# Altium PCB SPINNER_TWIN_STARS.PcbDoc (part 3 of 3)
Units mm, origin at the board's own origin, x right, y up, seen from the top; angles counter-clockwise.
Board outline 105 x 72 mm, 4 copper layers (Top_Elec, Mid Top Layer, Mid Bottom Layer, Bottom_GND), stack 0.742 mm thick; 199 components, 124 nets, 594 pads, 799 vias.
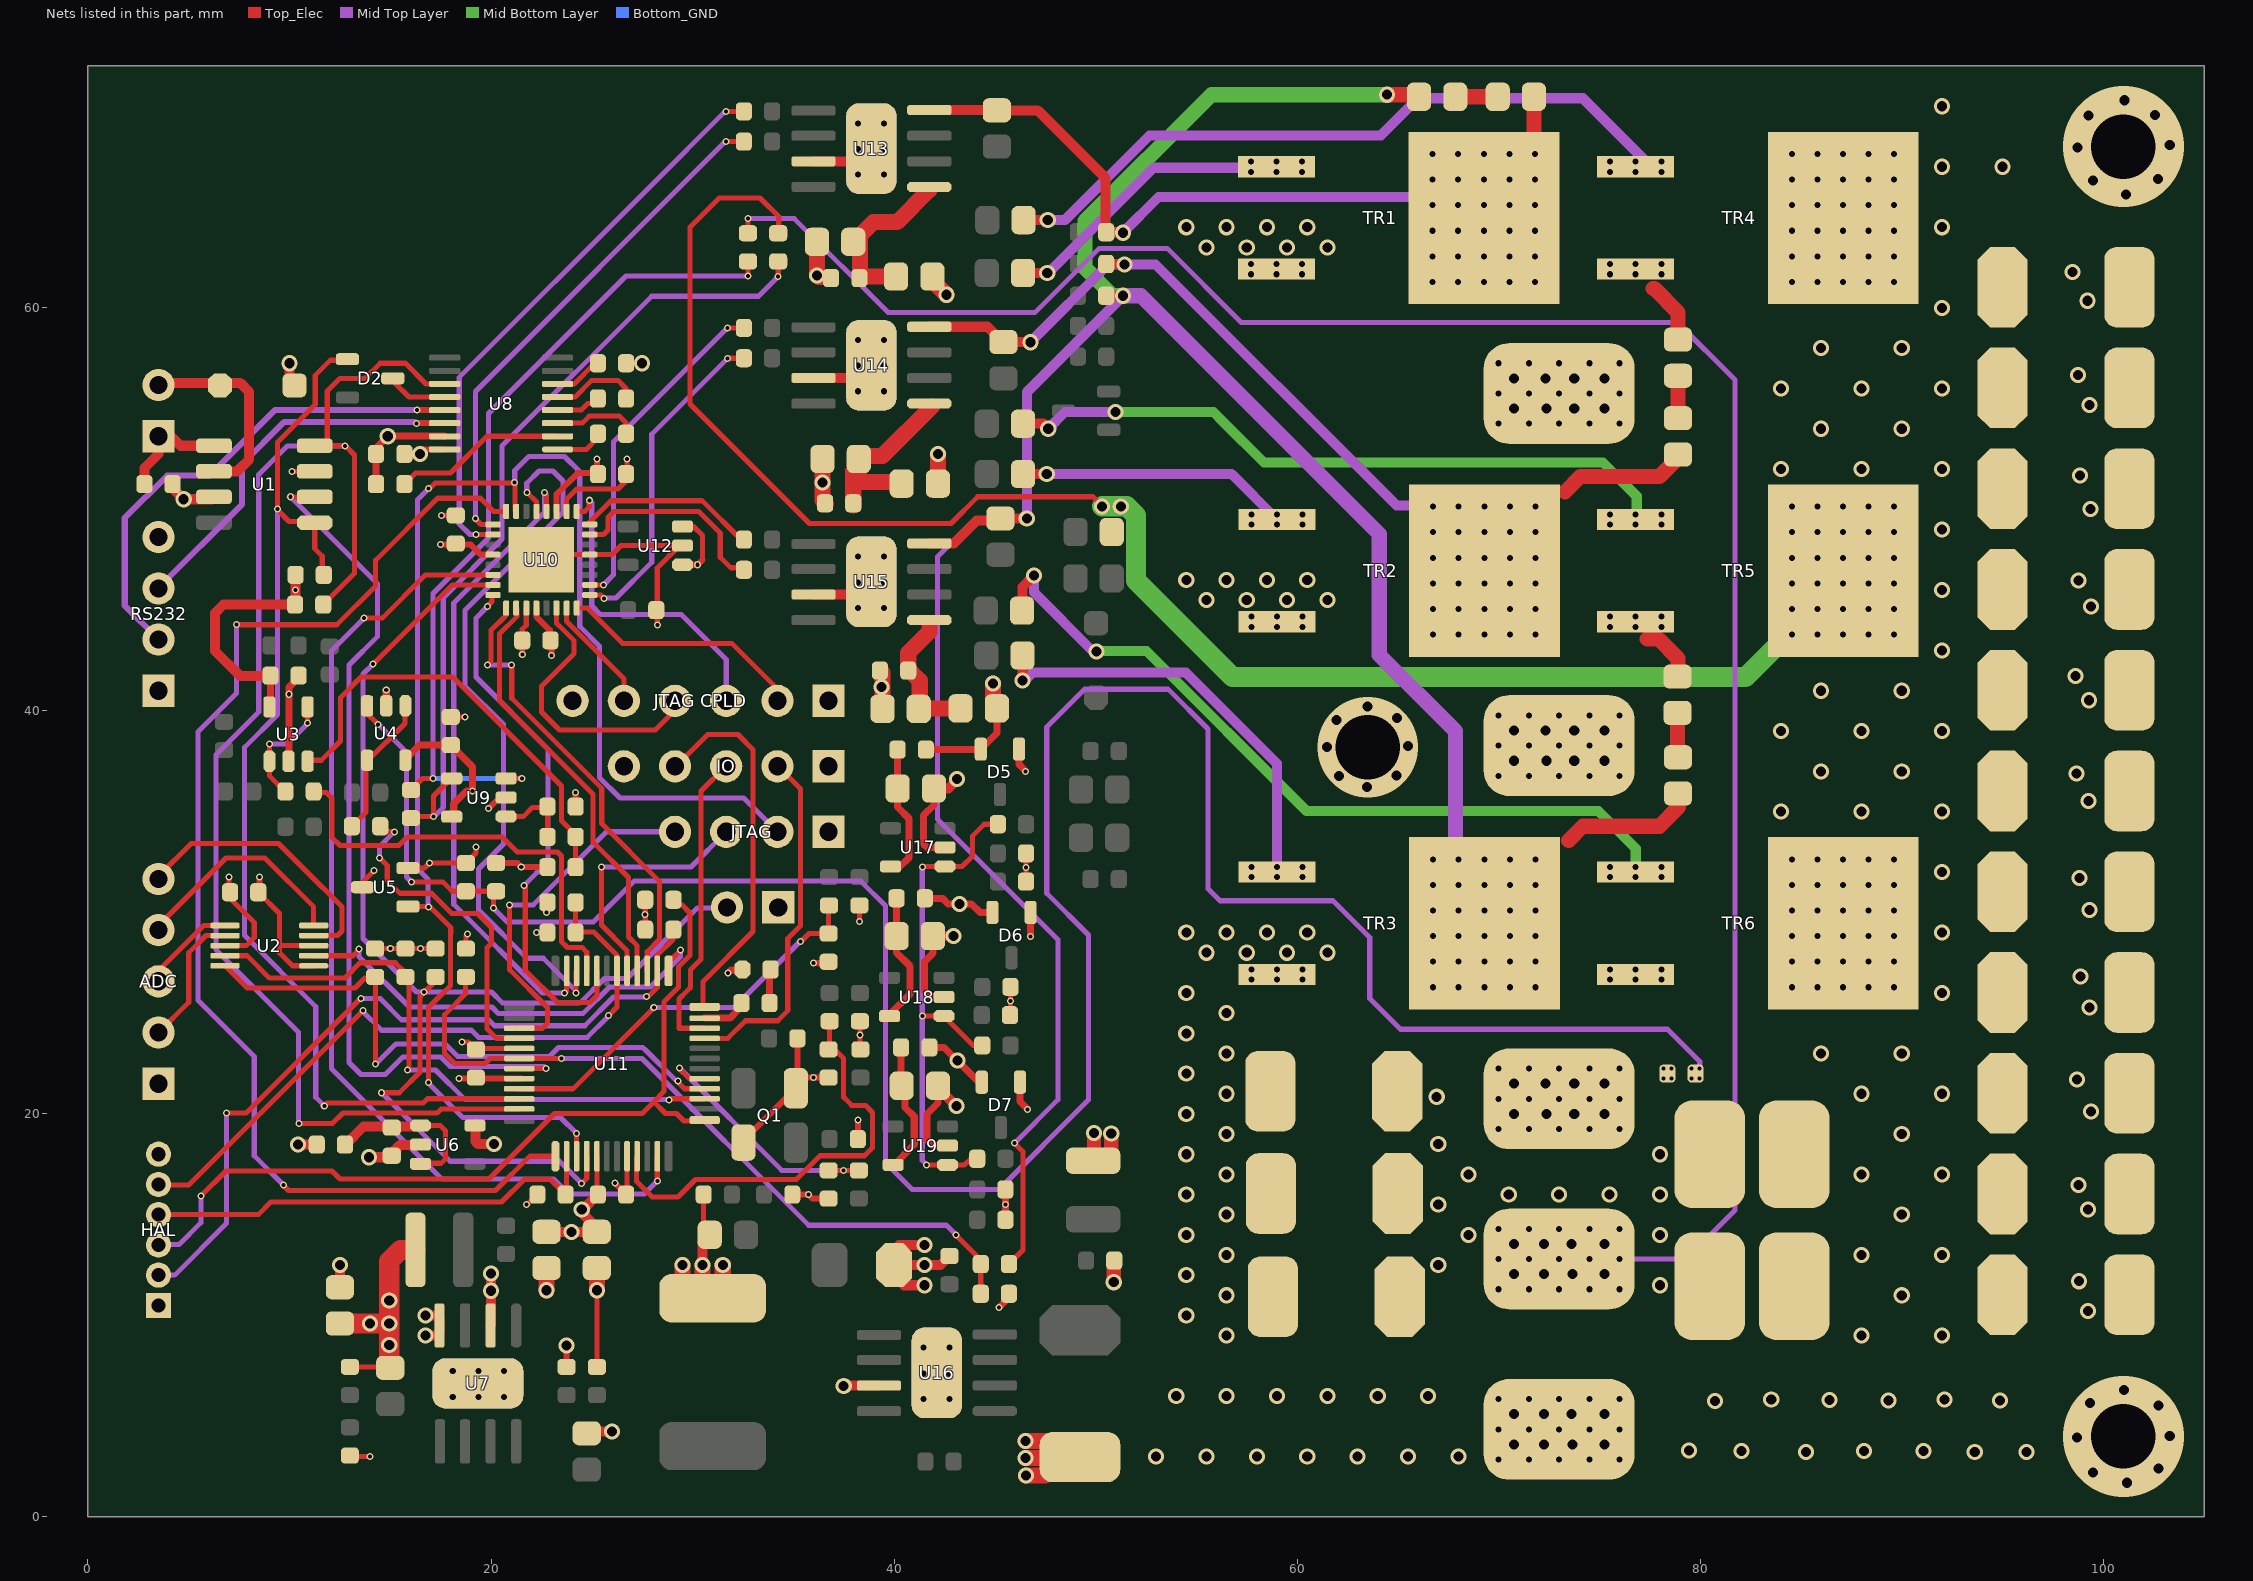
[diagram p4: the nets of this part, all layers, seen from the top]

## Via types
v1: diameter 0.3, hole 0.3, Top_Elec to Bottom_GND, 352 vias
v2: diameter 0.8, hole 0.5, Top_Elec to Bottom_GND, 262 vias
v3: diameter 0.35, hole 0.2, Top_Elec to Bottom_GND, 140 vias
v4: diameter 0.5, hole 0.5, Top_Elec to Bottom_GND, 40 vias
v5: diameter 6/6/6/6 (per signal layer), hole 3.2, Top_Elec to Bottom_GND, 4 vias
v6: diameter 5/5/5/5 (per signal layer), hole 3.2, Top_Elec to Bottom_GND, 1 vias

## Nets (pads, with @x,y where several pads share a name; then routed paths per layer and width w, separated by ;. In a path a pad name is that pad's centre, name@x,y a point inside that pad or via, vN(x,y) a via of type N, cw(c..) or ccw(c..) an arc to the next point about the centre after c; other vN are vias at no path point) (continued)
214: D2.1 R5.2 U1.1 U11.46 | length 56.1
  Top_Elec w0.254: U1.1@11.25,49.345 11.25,48.05 11.625,47.675 R5.2@11.625,46.75 ; U1.1@11.3,49.4 9.975,49.4 9.4,49.975 v3(9.4,50.025) 9.4,53.325 11.275,55.2 11.275,56.65 12.025,57.4 D2.1@12.9,57.4 ; v3(11.725,20.4) 11.875,20.55 16.65,20.55 16.85,20.75 U11.46@21.4,20.75
  Mid Top Layer w0.254: v3@9.425,50.05 9.425,50.025 9.4,50 9.4,39.825 7.775,38.2 7.775,28.849 11.3,25.324 11.3,20.825 v3(11.725,20.4)
215: U1.2 U11.43 | length 43.8
  Top_Elec w0.254: v3@9.985,50.615 U1.2@11.25,50.615 ; U11.43@21.4,22.25 v3@22.775,22.25
  Mid Top Layer w0.254: v3(10.05,50.625) 14.375,46.3 14.375,43.7 12.95,42.275 12.95,22.55 13.55,21.95 14.75,21.95 15.625,22.825 17.5,22.825 17.975,22.35 22.625,22.35 v3(22.725,22.25) v3@22.775,22.25
216: R6.2 U1.4 U8.11 U11.47 | length 71
  Top_Elec w0.254: v3@10.5,19.525 12.125,19.525 12.652,20.052 17.327,20.052 17.525,20.25 U11.47@21.4,20.25 ; U1.4@11.25,53.155 12.72,53.155 v3@12.75,53.125 ; U1.4@11.325,53.325 11.875,53.325 11.875,55.875 12.5,56.5 13.75,56.5 14.5,57.25 15.75,57.25 16.775,56.225 U8.11@17.7,56.225 ; R6.2@11.675,45.275 13.225,46.825 13.225,52.7 v3@12.75,53.175
  Mid Top Layer w0.254: v3@10.45,19.525 10.45,24.05 6.35,28.15 6.35,37.825 8.475,39.95 8.475,51.725 9.9,53.15 v3(12.75,53.15) v3@12.775,53.15
  other v3: 10.475,19.525
220: D1.1 LINBUS.2 U1.6 | length 10
  Top_Elec w0.35: LINBUS.2@3.525,56.175 LINBUS.2@3.625,56.275
  Top_Elec w0.5: LINBUS.2@3.625,56.275 7.55,56.275 8,55.825 8,52.475 7.41,51.885 U1.6@6.25,51.885
271: C26.2 U8.1 | length 2.4
  Top_Elec w0.254: U8.1@23.3,52.975 24.725,52.975 25.3,53.55 C26.2@25.3,53.75
272: C26.1 U8.3 | length 4.2
  Top_Elec w0.254: U8.3@23.3,54.275 24.525,54.275 24.875,54.625 26.375,54.625 26.7,54.3 C26.1@26.7,53.75
273: C8.2 U8.2 | length 8.6
  Top_Elec w0.254: C8.2@15.7,51.25 16.259,51.809 17.984,51.809 19.8,53.625 U8.2@23.3,53.625
275: C25.2 U8.4 | length 2.2
  Top_Elec w0.254: U8.4@23.3,54.925 24.475,54.925 24.8,55.25 25.05,55.25 C25.2@25.3,55.5
276: C25.1 U8.5 | length 4.4
  Top_Elec w0.254: U8.5@23.3,55.575 24.175,55.575 25,56.4 26.3,56.4 26.7,56 C25.1@26.7,55.5
277: C24.2 U8.6 | length 2.4
  Top_Elec w0.254: U8.6@23.3,56.225 24.125,56.225 25.15,57.25 C24.2@25.3,57.25
279: D2.3 U8.12 | length 3
  Top_Elec w0.254: D2.3@15.25,56.5 15.25,56.25 15.925,55.575 U8.12@17.7,55.575
CLKCPLD: BOOT.2 R13.2 U10.7 U11.4 | length 63.3
  Top_Elec w0.254: v3(14.15,42.325) 18.075,46.25 U10.7@20.1,46.25 ; v3@14.575,21.075 14.6,21.05 15.45,21.05 16.475,22.075 16.475,25.825 17.25,26.6 R13.2@17.25,26.8 ; v3@24.525,16.575 24.75,16.8 U11.4@24.75,17.9
  Mid Top Layer w0.254: v3(14.15,42.325) 13.65,41.825 13.65,28.7 16.3,26.05 v3(16.675,26.05) 20.025,26.05 20.578,25.497 24.397,25.497 25.624,26.724 26.749,26.724 30.25,30.225 BOOT.2@31.7,30.225 ; v3@14.562,21.038 14.587,21.038 17.975,17.65 23.4,17.65 v3(24.5,16.55)
  other v3: 14.575,21.05
CP_A: C36.1 R33.2 U11.45 | length 19.9
  Top_Elec w0.254: U11.45@21.4,21.25 24.075,21.25 v3@28.125,25.3 ; v3@35.362,28.537 35.775,28.95 36.65,28.95 36.75,29.05 R33.2@36.75,30.325
  Mid Top Layer w0.254: v3(28.075,25.275) 32.05,25.275 v3@35.35,28.575
  other v3: 35.35,28.55
CP_B: C37.1 R34.2 U11.9 | length 21.7
  Top_Elec w0.254: U11.9@27.225,17.825 27.225,16.65 28,15.875 29.272,15.875 30.144,16.747 35.147,16.747 36.003,17.603 36.003,17.606 36.322,17.925 38.528,17.925 38.925,18.322 38.925,20.075 38.575,20.425 37.9,20.425 37.55,20.775 ; C37.1@36.8,23.225 R34.2@36.8,24.6 ; C37.1@36.95,23.3 37.497,22.753 37.497,20.825
CP_C: C39.1 R38.2 U11.17 | length 13.9
  Top_Elec w0.254: v3@29.328,22.253 29.831,21.75 U11.17@30.6,21.75 ; C39.1@36.825,17.225 36.85,17.2 R38.2@38.25,17.2 v3(37.5,17.2)
  Mid Top Layer w0.254: v3@29.325,22.275 v3(29.35,22.275) 34.425,17.2 v3(37.5,17.2)
CURRENT: R4.2 U11.33 | length 21.7
  Top_Elec w0.254: R4.2@11.225,35.95 11.825,35.95 12.1,35.675 12.1,33.725 12.5,33.325 15.425,33.325 15.85,33.75 20.55,33.75 21.3,33 23.3,33 23.503,32.797 23.503,28.544 23.794,28.253 24.522,28.253 24.75,28.025 U11.33@24.75,27.1
CURRENT_IN: C19.1 R17.1 U3.3 | length 22.1
  Top_Elec w0.254: U3.3@10.925,37.55 11.575,37.55 12.525,38.5 12.525,40.65 13.55,41.675 18.1,41.675 23.5,36.275 23.5,34.55 24.2,33.85 R17.1@24.2,33.75 ; C19.1@24.2,32.25 R17.1@24.2,33.725
GND: "JTAG CPLD.1" ADC.1 BOOT.1 C1.2 C2.1 C3.2 C5.2 C7.2 C8.1 C11.2 C12.1 C13.2 C14.2 C15.2 C17.2 C18.2 C19.2 C20.2 C21.1 C22.2 C23.2 C24.1 C27.2 C28.2 C29.2 C31.1 C32.1 C33.1 C34.1 C35.1 C36.2 C37.2 C38.1 C39.2 C40.1 C41.1 C42.2 C43.2 C44.2 C46.2 C47.2 C48.2 C52.2 C56.1 C58.2 C59.2 C60.2 C62.2 C63.2 C64.2 C65.2 C66.2 C67.2 C68.2 C69.2 C70.2 C71.2 C72.2 C73.2 D1.2 D3.1 D4.1 D5.1 D6.1 D7.1 GND.1 HAL.1 IO.1 JTAG.1 LINBUS.1 Q1.2 Q1.4 R10.2 R16.2 R31.2 R39.2 R47.2 R48.2 R51.2 R53.2 RS232.1 RT1.2 TR1.3 TR2.3 TR3.3 TVS.2 U1.3 U1.5 U2.1 U2.3 U3.2 U4.2 U5.3 U6.2 U7.4 U7.9 U8.15 U9.2 U10.11 U10.21 U10.26 U10.33 U11.5 U11.41 U12.2 U13.7 U13.9 U14.7 U14.9 U15.7 U15.9 U16.7 U16.9 U17.2 U18.2 U19.2 | length 146.5
  Top_Elec w0.254: C2.1@8.45,31 9.5,29.95 9.5,28 10.15,27.35 U2.1@11.2,27.35 ; 9.6,28.35 U2.3@11.2,28.35 ; v3(10.115,51.885) U1.3@11.25,51.885 ; C3.2@10.45,41.75 C3.2@10.5,41.8 ; R10.2@13.05,3 v3(14,3) ; U5.3@13.625,31.25 13.625,31.5 v3(14.2,32.075) ; v3(17.55,49.7) C12.1@18.25,49.7 ; C11.2@18,39.7 v3(18.7,39.7) ; v3(18.551,23.576) 18.874,23.576 C14.2@19.25,23.2 19.3,23.25 U11.41@21.4,23.25 ; C13.2@18.75,28.2 18.75,28.825 v3@18.825,28.9 ; v3(21.55,42.8) C17.2@21.55,43.5 21.55,44.05 21.75,44.25 U10.11@21.75,45.1 ; U10.33@23.3,47.7 23.35,47.75 U10.21@24.9,47.75 26,47.75 26.45,48.2 U12.2@29.355,48.2 ; U10.26@23.75,49.9 23.75,50.5 24.253,51.003 26.294,51.003 26.75,51.459 v3(26.75,52.5) 26.75,51.8 C27.2@26.7,51.75 ; U11.5@25.25,17.9 25.25,16.05 C28.2@25.3,16 ; v3(28.25,44.25) 28.25,47.095 U12.2@29.355,48.2 ; U12.2@29.5,48.2 U12.2@29.355,48.2 ; R48.2@45.75,24.95 45.775,24.975 C47.2@45.775,26.3 ; C46.2@46.55,32.925 46.55,31.625 R47.2@46.6,31.575
  Top_Elec w0.3: C2.1@8.45,31 8.5,31.05 v3(8.5,31.75) ; v3(19.875,35.15) 20.425,35.7 U9.2@20.75,35.7 ; C15.2@20.25,32.45 21.3,32.45 v3(21.5,32.25) C19.2@22.8,32.25 ; v3(22.25,29) C20.2@22.8,29 ; C21.1@23.75,7.45 v2(23.75,8.5) ; R16.2@24.2,35.25 v3(24.2,35.95) ; Q1.2@32.5,18.55 32.5,18.65 Q1.4@35.2,21.35 ; R31.2@34.95,16 v3(35.75,16) 35.95,15.8 C39.2@36.75,15.8 ; C31.1@35.2,23.75 Q1.4@35.2,21.35 ; v3(36,27.5) 36.7,27.5 C36.2@36.75,27.55 ; C37.2@36.75,21.8 35.65,21.8 Q1.4@35.2,21.35 ; C38.1@38.2,18.75 v3(38.2,19.7)
  Top_Elec w0.35: U3.2@9.95,37.475 9.975,37.5 v3(9.975,40.825) 9.975,41.175 C3.2@10.475,41.675 ; C8.1@14.3,51.25 C7.2@14.3,52.75 14.3,53.05 v2(14.875,53.625) 14.895,53.645 17.68,53.645 U8.15@17.7,53.625 ; U4.2@14.8,40.225 v3(14.8,41.025) ; C24.1@26.7,57.25 v2(27.5,57.25) ; v3(31.75,27) 31.9,27.15 D3.1@32.5,27.15 ; C43.2@41.925,28.825 41.925,27.975 41.5,27.55 41.5,26.1 41.75,25.85 U18.2@42.4,25.85 ; C42.2@41.975,36.15 41.975,35.325 41.45,34.8 41.45,33.4 41.625,33.225 U17.2@42.525,33.225 ; C44.2@42.175,21.4 42.175,20.55 41.625,20 41.625,18.7 41.9,18.425 U19.2@42.65,18.425 ; v3(45.2,10.4) 45.7,10.9 R53.2@45.8,10.9 ; C48.2@45.525,16.25 45.525,14.825 R51.2@45.575,14.775 ; D5.1@46.2,38.1 46.2,37.35 v3@46.525,37.025 ; D7.1@46.25,21.575 46.25,20.625 v3@46.625,20.25 ; v3(46.775,28.8) D6.1@46.775,30
  Top_Elec w0.5: C1.2@2.8,51.25 2.8,52.05 3.5,52.75 3.5,53.75 4,53.75 4.595,53.155 U1.5@6.25,53.155 ; v2(10,57.25) 10,56.425 D1.2@10.225,56.2 ; C5.2@12.5,11.4 v2(12.5,12.5) ; R10.2@13,3.05 R10.2@13.05,3 ; v2(13.95,17.85) 14.875,17.85 15.475,18.45 16.45,18.45 U6.2@16.5,18.5 ; v2(16.75,9) 17.25,9 17.44,9.19 U7.4@17.44,9.5 17.44,9.81 17.25,10 v2(16.75,10) ; C18.2@22.85,14.25 22.95,14.15 C23.2@25.25,14.15 25.35,14.25 24.5,15.1 v2(24.5,15.25) 24.5,15.2 24.525,15.225 C28.2@25.3,16 ; C22.2@24.75,4.15 24.85,4.25 v2(26,4.25) ; U15.7@36,45.77 38.245,45.77 U15.9@38.875,46.4 ; U14.7@36,56.52 38.245,56.52 U14.9@38.875,57.15 ; U13.7@36,67.27 38.245,67.27 U13.9@38.875,67.9 ; v2(37.5,6.5) 37.52,6.52 U16.7@39.25,6.52 ; v2(41.5,11.5) 40.5,11.5 40,12 D4.1@40,12.5 ; v2(41.5,13.5) 40.25,13.5 40,13.25 D4.1@40,12.5 ; C43.2@41.925,28.825 v2@42.8,28.825 ; C42.2@41.975,36.15 42.7,36.15 v2@43.025,36.475 ; C44.2@42.175,21.4 42.075,21.4 v2@43.1,20.375 ; R39.2@42.75,12.95 42.3,12.5 v2(41.5,12.5) D4.1@40,12.5
  Top_Elec w0.7: C56.1@49.925,17.775 v2(49.925,19.05) ; C56.1@50.775,17.575 v2(50.775,19.025) ; v2(50.9,11.65) 50.9,12.675 C58.2@50.95,12.725
  Top_Elec w0.8: C32.1@36.175,63.275 36.175,61.625 36.275,61.525 C35.1@36.875,61.525 ; C33.1@36.45,52.5 36.45,50.45 C34.1@36.625,50.275 ; C40.1@39.35,41.975 39.425,41.9 C41.1@39.425,40.1 ; v2(46.525,3.775) 49.05,3.775 48.2,2.925 v2@46.575,2.925 ; v2(46.55,2.05) C52.2@47.5,2.05
  other v1: 70,2.85 71.5,2.85 73,2.85 74.5,2.85 76,2.85 70,4.35 71.5,4.35 74.5,4.35 76,4.35 70,5.85 71.5,5.85 73,5.85 74.5,5.85 76,5.85 41.45,5.86 42.75,5.86 18.1,5.95 19.37,5.95 20.64,5.95 41.45,7.13 42.75,7.13 18.1,7.25 19.37,7.25 20.64,7.25 41.45,8.4 42.75,8.4 57.73,26.666 59,26.666 60.27,26.666 57.73,27.174 59,27.174 60.27,27.174 57.73,44.166 59,44.166 60.27,44.166 57.73,44.674 59,44.674 60.27,44.674 38.2,45.11 39.5,45.11 38.2,46.38 39.5,46.38 38.2,47.65 39.5,47.65 38.2,55.86 39.5,55.86 38.2,57.13 39.5,57.13 38.2,58.4 39.5,58.4 57.705,61.666 58.975,61.666 60.245,61.666 57.705,62.174 58.975,62.174 60.245,62.174 38.2,66.61 39.5,66.61 38.2,67.88 39.5,67.88 38.2,69.15 39.5,69.15
  other v2: 101.175,1.7 99.5,2.2 102.75,2.4 46.525,2.925 53,3 55.5,3 58,3 60.5,3 63,3 65.5,3 68,3 85.25,3.225 93.625,3.225 96.2,3.225 82.05,3.275 88.125,3.275 91.075,3.275 79.45,3.3 98.7,3.95 103.3,4.025 102.75,5.525 99.35,5.65 80.725,5.75 89.35,5.775 94.875,5.775 83.525,5.825 86.425,5.8 92.125,5.825 54,6 56.5,6 59,6 61.5,6 64,6 66.5,6 101.025,6.3 56.5,9 54.5,10 99.25,10.225 56.5,11 98.8,11.7 54.5,12 56.5,13 54.5,14 24,14.15 56.5,15 99.25,15.25 54.5,16 98.775,16.475 56.5,17 54.5,18 56.5,19 54.5,20 99.4,20.125 43.1,20.4 56.5,21 98.7,21.7 54.5,22 56.5,23 54.5,24 56.5,25 99.325,25.275 54.5,26 98.875,26.825 55.5,28 57.5,28 59.5,28 61.5,28 42.95,28.825 54.5,29 56.5,29 58.5,29 60.5,29 99.325,30.125 98.825,31.7 99.275,35.525 63.475,36.225 43.125,36.625 62.075,36.775 64.925,36.8 98.675,36.9 61.475,38.2 65.5,38.25 61.95,39.55 64.95,39.65 63.5,40.225 99.3,40.525 39.375,41.175 98.625,41.725 99.4,45.175 55.5,45.5 57.5,45.5 59.5,45.5 61.5,45.5 98.775,46.475 54.5,46.5 56.5,46.5 58.5,46.5 60.5,46.5 99.375,50.025 36.45,51.325 98.85,51.675 99.325,55.175 98.75,56.675 99.225,60.35 36.175,61.6 98.475,61.775 55.5,63 57.5,63 59.5,63 61.5,63 54.5,64 56.5,64 58.5,64 60.5,64 101.125,65.625 99.5,66.325 102.725,66.4 98.725,67.95 103.3,68.075 99.275,69.55 102.575,69.575 101.05,70.3
  other v3: 45.525,15.5 46.625,20.225 78.175,21.75 78.575,21.75 36,21.8 78.175,22.25 78.575,22.25 45.775,25.6 18.825,28.925 46.55,32.225 46.525,37
  other v4: 70.75,3.6 72.25,3.6 73.672,3.6 75.25,3.6 70.75,5.1 72.25,5.1 73.623,5.1 75.25,5.1
  other v5: 101,4 101,68
  other v6: 63.5,38.2
HA: HAL.4 R15.2 U11.2 | length 23
  Top_Elec w0.254: HAL.4@3.525,15 8.45,15 9.075,15.625 20.525,15.625 21.647,16.747 22.953,16.747 R15.2@23.7,16 ; R15.2@23.7,16.175 23.75,16.225 U11.2@23.75,17.9
HB: HAL.3 R20.2 U11.13 | length 42.8
  Top_Elec w0.254: v3(5.6,15.925) 6.846,17.171 12.104,17.171 12.5,16.775 19.9,16.775 23.149,20.024 27.499,20.024 28.354,20.879 28.354,20.897 28.575,21.117 28.575,25.55 29.307,26.282 29.307,27.307 29.646,27.646 29.875,27.875 29.875,29.975 29.475,30.375 R20.2@28.825,30.375 ; 28.075,20.6 28.651,20.024 29.197,20.024 29.571,19.65 U11.13@30.525,19.65
  Mid Top Layer w0.254: HAL.3@3.5,13.525 4.525,13.525 5.6,14.6 v3(5.6,15.925)
HC: HAL.2 R21.2 U11.26 | length 38
  Top_Elec w0.254: v3@6.875,20 v3(6.875,20.05) 7.85,20.05 13.525,25.725 v3(13.55,25.725) ; v3(27.725,25.825) 27.8,25.825 28.25,26.275 U11.26@28.25,27.1 28.25,27.875 29.026,28.651 R21.2@29.026,28.974
  Mid Top Layer w0.254: HAL.2@3.575,12.075 3.65,12 4.3,12 6.875,14.575 v3(6.875,20.05) ; v3(13.55,25.725) 14.5,25.725 15.55,24.675 19.875,24.675 20.175,24.375 24.65,24.375 26.075,25.8 27.675,25.8 v3@27.725,25.85
IPH1H: U10.6 U11.11 | length 50.5
  Top_Elec w0.254: v3(13.7,44.6) 14.6,44.6 16.75,46.75 U10.6@20.1,46.75 ; v3@28.25,16.7 U11.11@28.25,17.9
  Mid Top Layer w0.254: v3(13.7,44.6) 12.075,42.975 12.075,22.25 17.55,16.775 23.1,16.775 23.85,16.025 27.6,16.025 v3(28.25,16.675)
IPH1L: U10.8 U11.32 | length 26.5
  Top_Elec w0.254: v3(19.825,45.175) 19.825,45.2 20.05,45.425 20.05,45.725 U10.8@20.075,45.75 ; v3@21.65,31.35 21.7,31.3 21.7,27.125 23.3,25.525 24.9,25.525 25.25,25.875 U11.32@25.25,27.1
  Mid Top Layer w0.254: v3@19.8,45.15 19.25,44.6 19.25,41.675 22.825,38.1 22.825,32.525 v3(21.625,31.325)
IPH2H: U10.9 U11.27 | length 22.9
  Top_Elec w0.254: v3(19.825,42.275) 20.001,42.451 20.001,44.001 20.188,44.188 20.562,44.562 20.75,44.75 U10.9@20.75,45.1 ; v3(21.025,42.275) 21.025,40.625 25.493,36.157 25.493,34.407 28.35,31.55 28.35,28.65 27.75,28.05 U11.27@27.75,27.1
  Mid Top Layer w0.254: v3(19.825,42.275) v3(21.025,42.275)
IPH2L: U10.10 U11.28 | length 21.2
  Top_Elec w0.254: U10.10@21.275,45.075 21.275,44.675 20.425,43.825 20.425,40.5 25.069,35.856 25.069,33.481 26.825,31.725 26.825,28.775 27.25,28.35 U11.28@27.25,27.1
IPH3H: U10.29 U11.34 | length 36.2
  Top_Elec w0.254: v3@21.8,50.825 22.25,50.375 U10.29@22.25,49.9 ; v3(24.225,26) 24.225,27.075 U11.34@24.25,27.1
  Mid Top Layer w0.254: v3@21.775,50.8 v3(21.775,50.825) 21.775,51.3 22.375,51.9 23.075,51.9 23.575,51.4 23.575,49.85 18.7,44.975 18.7,41.25 20.625,39.325 20.625,33.4 19.375,32.15 19.375,30.125 21.775,27.725 22.593,27.725 24.225,26.093 v3(24.225,26)
IPH3L: U10.28 U11.35 | length 31.7
  Top_Elec w0.254: v3(22.65,50.825) 22.75,50.725 U10.28@22.75,49.9 ; v3@23.65,25.975 23.75,26.075 U11.35@23.75,27.1
  Mid Top Layer w0.254: v3(22.65,50.825) 22.65,49.85 18.15,45.35 18.15,30.4 22.55,26 v3(23.65,26)
NetADC_2: ADC.2 U2.7 | length 6.7
  Top_Elec w0.254: ADC.2@3.5,24.04 5,25.54 5,28 5.85,28.85 U2.7@6.8,28.85
NetADC_3: ADC.3 U2.6 | length 4.8
  Top_Elec w0.254: ADC.3@3.5,26.58 3.575,26.655 3.575,27.175 5.75,29.35 U2.6@6.8,29.35
NetADC_4: ADC.4 U2.5 | length 11.1
  Top_Elec w0.254: ADC.4@3.375,29.475 3.625,29.475 6.85,32.7 8.775,32.7 11.2,30.275 U2.5@11.2,29.35
NetADC_5: ADC.5 U2.4 | length 13.9
  Top_Elec w0.254: ADC.5@3.5,31.66 3.5,31.8 5.125,33.425 9.45,33.425 10.75,32.125 12.6,30.275 12.6,29.075 12.375,28.85 U2.4@11.175,28.85
NetC10_1: C10.1 R30.2 U9.3 | length 42.2
  Top_Elec w0.254: C10.1@16.025,36.075 16.6,36.65 v3(17.125,36.65) ; U9.3@20.725,36.675 U9.3@20.75,36.65 v3(21.525,36.65) ; v3(32.75,61.575) R30.2@32.75,62.3
  Mid Top Layer w0.254: v3(17.125,36.65) 17.125,45.825 19.875,48.575 19.875,54.75 26.7,61.575 v3(32.75,61.575)
  Bottom_GND w0.254: v3(17.125,36.65) v3(21.525,36.65)
NetC10_2: C10.2 R32.2 U9.4 | length 41.1
  Top_Elec w0.254: C10.2@16.025,34.75 v3(17.15,34.75) 17.15,35.775 U9.4@18,36.625 ; v3(34.25,61.55) R32.2@34.25,62.3
  Mid Top Layer w0.254: v3(17.15,34.75) 17.175,34.75 17.627,35.202 17.627,45.602 20.55,48.525 20.55,53.15 27.975,60.575 33.275,60.575 v3(34.25,61.55)
NetC32_2: C32.2 C35.2 L3.1 U13.1 | length 8.7
  Top_Elec w0.8: C32.2@37.95,63.2 C32.2@38.3,62.85 ; C35.2@38.3,61.55 C32.2@38.3,62.85 ; C35.2@38.325,61.55 L3.1@40.1,61.55 ; U13.1@41.75,65.85 40.15,64.25 38.975,64.25 38.3,63.575 C32.2@38.3,62.85
NetC33_2: C33.2 C34.2 L4.1 U14.1 | length 9.4
  Top_Elec w0.8: C34.2@37.975,50.2 37.975,51.875 38.25,52.15 38.25,51.35 L4.1@40.275,51.35 ; C33.2@38.4,52.75 38.5,52.65 39.425,52.65 U14.1@41.875,55.1
NetC40_2: C40.2 C41.2 L5.1 U15.1 | length 7
  Top_Elec w0.8: C40.2@40.7,42 40.7,42.875 41.75,43.925 U15.1@41.75,44.3 ; C40.2@40.725,42.05 41.275,41.5 41.275,40.05 41.35,40.125 L5.1@43.3,40.125
NetC73_1: C73.1 L10.2 U6.1 U6.3 | length 8.2
  Top_Elec w0.254: U6.3@16.5,17.55 17.525,17.55 17.75,17.775 17.75,19.15 17.475,19.425 U6.1@16.5,19.425
  Top_Elec w0.5: L10.2@12.775,18.475 13.675,19.375 16.45,19.375 U6.1@16.5,19.425
NetC74_2: C74.2 R62.1 | length 2.2
  Top_Elec w0.75: R62.1@79.05,56.625 78.9,56.475 78.9,54.725 C74.2@79.075,54.55
NetC75_2: C75.2 R64.1 | length 2.2
  Top_Elec w0.75: R64.1@67.85,70.475 C75.2@69.95,70.475 69.975,70.475 C75.2@70,70.5
NetC76_1: C76.1 R63.1 | length 2.1
  Top_Elec w0.75: C76.1@78.875,37.775 R63.1@78.875,39.9
NetD3_2: D3.2 R29.2 | length 1.2
  Top_Elec w0.35: R29.2@33.825,25.5 D3.2@33.825,26.75
NetIO_2: IO.2 U11.21 | length 17.6
  Top_Elec w0.254: U11.21@30.6,23.75 31.75,23.75 32.625,24.625 34.225,24.625 34.725,25.125 34.725,28.705 35.347,29.327 35.347,36.153 IO.2@34.225,37.275
NetIO_3: IO.3 U11.22 | length 15.3
  Top_Elec w0.254: 29.731,26.106 29.325,25.7 29.325,24.25 U11.22@30.6,24.25 ; 29.731,26.106 29.9,26.275 29.9,27.15 30.425,27.675 30.425,36.025 IO.3@31.675,37.275
NetIO_4: IO.4 U11.24 | length 18.6
  Top_Elec w0.254: IO.4@29.15,37.225 30.75,38.825 32.25,38.825 33,38.075 33,29.05 30.525,26.575 30.525,25.385 U11.24@30.6,25.31
"NetJTAG CPLD_2": "JTAG CPLD.2" U10.16 | length 12.2
  Top_Elec w0.254: U10.16@24.25,45.1 24.775,45.1 26.525,43.35 31.95,43.35 34.2,41.1 34.2,40.5
"NetJTAG CPLD_3": "JTAG CPLD.3" U10.25 | length 16.2
  Top_Elec w0.254: U10.25@24.25,49.9 24.65,49.9 24.875,50.125 v3(24.875,50.45)
  Mid Top Layer w0.254: v3(24.875,50.45) 25,50.325 25,45.225 25.45,44.775 29.45,44.775 31.67,42.555 31.67,40.5
"NetJTAG CPLD_4": "JTAG CPLD.4" U10.14 | length 14.1
  Top_Elec w0.254: U10.14@23.275,45.075 23.25,45.05 23.25,44.35 23.353,44.247 23.356,44.247 24.125,43.478 24.125,42.85 22.5,41.225 22.5,39.95 23.4,39.05 28.15,39.05 29.13,40.03 29.13,40.5
"NetJTAG CPLD_5": "JTAG CPLD.5" U10.15 | length 5.8
  Top_Elec w0.254: U10.15@23.75,45.1 23.75,44.452 26.59,41.612 26.59,40.5
NetR4_1: R4.1 U3.1 U3.4 | length 5.8
  Top_Elec w0.254: v3(9,38.35) U3.1@9,37.5 9,36.775 R4.1@9.8,35.975 ; v3(10.9,39.4) U3.4@10.9,40.2
  Mid Top Layer w0.254: v3(9,38.35) 9.875,38.35 v3@10.9,39.375
NetR8_1: R8.1 U4.1 U4.4 | length 7.1
  Top_Elec w0.254: R8.1@13.1,34.275 13.8,34.975 13.8,37.45 15.725,39.375 U4.1@15.725,40.325
NetR16_1: R16.1 R17.2 U9.1 | length 3.7
  Top_Elec w0.254: U9.1@20.75,34.75 21.6,34.75 22.05,35.2 22.8,35.2 R17.2@22.8,33.775 ; R17.2@22.825,33.775 R17.2@22.85,33.8
NetR29_1: R29.1 U11.23 | length 2.1
  Top_Elec w0.254: R29.1@32.25,25.15 R29.1@32.25,25.45
  Top_Elec w0.35: U11.23@30.6,24.75 31.85,24.75 R29.1@32.25,25.15
NetR56_2: R56.2 R57.2 R58.2 U17.1 U18.1 U19.1 | length 26.3
  Top_Elec w0.254: v3@41.375,32.275 U17.1@42.525,32.275 ; v3(41.4,24.85) U18.1@42.475,24.85 43.925,23.4 R56.2@44.375,23.4 ; v3@41.55,17.475 v3(41.6,17.475) U19.1@42.65,17.475 ; U17.1@42.55,32.275 43.375,32.275 43.9,32.8 43.9,33.8 44.475,34.375 R57.2@45.15,34.375 ; U19.1@42.65,17.5 42.675,17.475 43.5,17.475 43.8,17.775 R58.2@44.125,17.775
  Mid Top Layer w0.254: v3@41.4,32.2 v3(41.4,24.85) 41.4,17.7 v3@41.625,17.475
  other v3: 41.4,32.25
NetU2_2: U2.2 U11.25 | length 22.6
  Top_Elec w0.254: U2.2@11.2,27.85 13.15,27.85 13.413,28.113 v3@13.413,28.188 ; U11.25@28.81,27.1 28.81,27.535 v3(29.4,28.125)
  Mid Top Layer w0.254: v3@13.449,28.176 13.449,27.801 15.95,25.3 20.05,25.3 20.375,24.975 24.55,24.975 25.875,26.3 27.9,26.3 29.4,27.8 v3@29.4,28.1
  other v3: 13.451,28.176
OE: U10.32 U11.1 | length 61.7
  Top_Elec w0.254: v3(7.375,44.275) 12.35,44.275 14.275,46.2 14.275,47.475 17.35,50.55 19.475,50.55 20.125,49.9 U10.32@20.75,49.9 ; v3@9.725,16.475 9.725,16.425 9.95,16.2 20.225,16.2 21.925,17.9 U11.1@23.19,17.9
  Mid Top Layer w0.254: v3(7.375,44.275) 7.375,40.875 5.45,38.95 5.45,25.65 8.25,22.85 8.25,17.925 v3(9.7,16.475)
OPH1H: R23.1 U10.2 | length 28.6
  Top_Elec w0.254: v3@19.35,48.75 U10.2@20.1,48.75 ; v3@31.675,69.75 R23.1@32.55,69.75
  Mid Top Layer w0.254: v3@19.225,48.75 18.95,48.75 18.425,49.275 18.425,56.55 27.851,65.976 31.625,69.75 v3(31.65,69.75)
  other v3: 19.25,48.75
OPH1L: R24.1 U10.1 | length 25.8
  Top_Elec w0.254: v3@19.225,49.525 19.5,49.25 U10.1@20.1,49.25 ; v3(31.65,68.25) R24.1@32.55,68.25
  Mid Top Layer w0.254: v3(19.225,49.55) 19.225,55.85 31.575,68.2 31.625,68.2 v3@31.675,68.25
OPH2H: R25.1 U10.18 | length 16.9
  Top_Elec w0.254: U10.18@24.9,46.25 v3(25.575,46.25) v3@25.6,46.25 ; v3(31.725,59) R25.1@32.55,59
  Mid Top Layer w0.254: v3(25.575,46.25) 26.075,46.75 26.075,53.35 v3(31.725,59) v3@31.75,59.025
OPH2L: R26.1 U10.17 | length 16.4
  Top_Elec w0.254: U10.17@24.9,45.75 25.45,45.75 v3@25.65,45.55 ; v3@31.7,57.5 R26.1@32.55,57.5
  Mid Top Layer w0.254: v3@25.65,45.6 26.2,45.6 27.975,47.375 27.975,53.725 v3(31.725,57.475)
  other v3: 25.6,45.575
OPH3H: R27.1 U10.24 | length 9
  Top_Elec w0.254: U10.24@24.9,49.25 24.9,49.375 25.95,50.425 30.475,50.425 32.4,48.5 R27.1@32.55,48.5
OPH3L: R28.1 U10.23 | length 10.4
  Top_Elec w0.254: U10.23@24.9,48.75 25.575,48.75 25.8,48.975 25.8,49.6 26.1,49.9 30.3,49.9 31.375,48.825 31.375,47.625 31.9,47.1 R28.1@32.6,47.1
P1HI: R40.2 TR4.1 | length 35.4
  Top_Elec w0.5: R40.2@46.425,64.35 v2@47.55,64.35
  Mid Top Layer w0.5: v2(47.625,64.35) 48.475,64.35 52.675,68.55 64.15,68.55 66,70.4 74.175,70.4 77.45,67.125 TR4.1@78.075,67.125
  other v1: 75.53,66.746 76.8,66.746 78.07,66.746 75.53,67.254 76.8,67.254 78.07,67.254
P1LO: R41.2 TR1.1 | length 14.7
  Top_Elec w0.5: R41.2@46.4,61.725 v2@47.55,61.725
  Mid Top Layer w0.5: v2(47.6,61.725) 47.65,61.725 52.875,66.95 TR1.1@58.975,66.95
  other v1: 57.705,66.746 58.975,66.746 60.245,66.746 57.705,67.254 58.975,67.254 60.245,67.254
P2HI: R42.2 TR5.1 | length 34
  Top_Elec w0.5: R42.2@46.4,54.25 47.4,54.25 v2(47.65,54)
  Mid Top Layer w0.5: v2(47.65,54) 48.478,54.828 v2(50.977,54.828)
  Mid Bottom Layer w0.5: v2(50.977,54.828) 55.847,54.828 56.35,54.325 58.35,52.325 75.175,52.325 76.85,50.65 TR5.1@76.85,49.3
  other v1: 75.53,49.246 76.8,49.246 78.07,49.246 75.53,49.754 76.8,49.754 78.07,49.754
P2LO: R43.2 TR2.1 | length 13.4
  Top_Elec w0.5: R43.2@46.4,51.75 v2@47.45,51.75
  Mid Top Layer w0.5: v2(47.575,51.75) 56.75,51.75 TR2.1@58.975,49.525
  other v1: 57.73,49.246 59,49.246 60.27,49.246 57.73,49.754 59,49.754 60.27,49.754
P3HI: R44.2 TR6.1 | length 38.9
  Top_Elec w0.5: R44.2@46.675,45.35 46.375,45.35 46.375,46.15 v2@46.825,46.6
  Mid Top Layer w0.5: v2(46.95,46.725) 46.95,45.875 49.875,42.95 v2(50.05,42.95)
  Mid Bottom Layer w0.5: v2@50.05,42.975 52.525,42.975 60.475,35.025 74.95,35.025 76.8,33.175 v1(76.8,32.254) TR6.1@76.8,32
  other v1: 75.53,31.746 76.8,31.746 78.07,31.746 75.53,32.254 78.07,32.254
P3LO: R45.2 TR3.1 | length 21
  Top_Elec w0.5: v2@46.375,41.625 R45.2@46.375,42.75
  Mid Top Layer w0.5: v2@46.5,41.525 46.875,41.9 54.475,41.9 59,37.375 v1(59,32.254) TR3.1@59,32
  other v1: 57.73,31.746 59,31.746 60.27,31.746 57.73,32.254 60.27,32.254
  other v2: 46.375,41.5
P3V3_ARROW: "JTAG CPLD.6" C2.2 C3.1 C7.1 C11.1 C12.2 C14.1 C17.1 C27.1 C28.1 R5.1 R6.1 R11.1 R12.1 R13.1 R14.1 R35.2 R36.2 R37.2 U2.8 U3.5 U4.5 U5.2 U6.5 U8.16 U9.5 U10.4 U10.12 U10.27 U11.8 U11.44 U12.1 U12.3 | length 58.1
  Top_Elec w0.254: U2.8@6.8,28.35 7.85,28.35 8.25,28.75 8.25,29.5 7.05,30.7 C2.2@7.05,31 7,31.05 v3(7,31.75) ; R11.1@14.25,28.2 R12.1@15.75,28.2 R13.1@17.25,28.2 ; U5.2@15.875,32.2 16.7,32.2 v3(16.95,32.45) R14.1@18.75,32.45 19.25,32.95 v3(19.25,33.25) ; U9.5@18.125,34.725 U9.5@18.15,34.75 ; C28.1@26.75,15.95 U11.8@26.75,17.9 ; U12.3@29.5,49.15 30.05,49.15 30.5,48.7 30.5,47.5 ; v3(38.275,29.55) R35.2@38.275,30.35 ; R37.2@38.3,23.175 R36.2@38.3,24.6
  Top_Elec w0.3: C7.1@15.7,52.75 15.944,52.506 16.337,52.9 16.475,52.762 v2(16.475,52.75) 16.475,52.9 16.55,52.975 U8.16@17.7,52.975 ; C12.2@18.25,48.3 18.2,48.25 v3(17.5,48.25) 19,48.25 19.5,47.75 U10.4@20.1,47.75 ; v3(18.401,21.751) U11.44@21.5,21.751 ; U10.12@22.25,45.1 22.25,44.666 22.916,44 22.916,43.584 C17.1@23,43.5 ; C17.1@22.95,43.5 22.95,43.55 C17.1@23,43.5 ; v3(23,42.75) C17.1@23,43.5 ; U10.27@23.25,49.9 23.25,50.75 24.3,51.8 C27.1@25.25,51.8 ; v3(25.25,52.5) C27.1@25.25,51.8 ; C27.1@25.3,51.75 C27.1@25.25,51.8 ; v3(26.15,16.575) 26.15,16.55 C28.1@26.75,15.95 ; U12.1@29.5,47.25 v3(30.25,47.25) 30.5,47.5
  Top_Elec w0.35: U3.5@9.025,40.125 9.05,40.15 C3.1@9.05,41.75 ; U4.5@15.725,37.575 16.45,38.3 C11.1@18,38.3 19.075,37.225 v3(19.075,36.025) 18.775,36.025 18.15,35.4 U9.5@18.15,34.75
  Top_Elec w0.5: C3.1@9.025,41.725 7.55,41.725 6.3,42.975 6.3,44.85 6.725,45.275 R6.1@10.275,45.275 ; R6.1@10.3,45.25 v3(10.3,46) R5.1@10.3,46.75 ; U6.5@19.225,19.475 19.225,18.625 19.35,18.5 v2(20.15,18.5)
  other v3: 38.3,23.925 15,28.2 16.5,28.2
P5V: C5.1 C9.1 HAL.6 IO.5 L1.1 L10.1 R9.1 R15.1 R18.1 R20.1 R21.1 RS232.4 | length 14.6
  Top_Elec w0.254: R9.1@13,7.45 C9.1@14.95,7.45 ; v3(21.75,15.5) 21.8,15.5 R15.1@22.3,16 ; R21.1@27.6,28.975 R21.1@27.6,29 ; R21.1@27.65,28.9 R20.1@27.65,30.525
  Top_Elec w0.5: v2@10.375,18.475 L10.1@11.35,18.475 ; C5.1@12.475,9.6 C5.1@12.525,9.65
  Top_Elec w1: C5.1@12.5,9.6 v2(14,9.6) v2(14.95,9.6) ; C9.1@14.95,7.45 v2(14.95,9.6) ; L1.1@16.25,13.25 15.5,13.25 14.95,12.7 v2(14.95,9.6)
  other v2: 14.95,8.525 14.95,10.75 10.425,18.475
  other v3: 27.65,29.9 22.75,30
P12V: C1.1 C18.1 C23.1 C30.1 D5.2 D6.2 D7.2 L2.1 L3.2 L4.2 L5.2 L6.1 L7.1 L8.1 R19.2 R22.1 U1.7 U7.2 | length 34.7
  Top_Elec w0.254: R19.2@25.25,7.45 v2(25.25,11.25) ; R22.1@30.55,16 30.55,14.3 C30.1@30.85,14
  Top_Elec w0.35: L7.1@41.525,30.7 42.4,30.7 42.675,30.425 43.85,30.425 44.275,30 D6.2@44.85,30 ; L6.1@41.575,38.075 44.275,38.075 45.1,38.9 L5.2@45.1,40.125 ; L8.1@41.75,23.3 42.475,23.3 44.175,21.6 D7.2@44.325,21.6
  Top_Elec w0.5: C1.1@4.2,51.25 4.2,51.05 v2(4.75,50.5) 6.135,50.5 U1.7@6.25,50.615 ; U7.2@19.98,9.5 U7.2@20,9.52 ; U7.2@20,9.525 v2@20,12 ; v2(30.5,12.5) 30.5,13.65 C30.1@30.85,14
  Top_Elec w0.8: v2(22.75,11.25) C18.1@22.75,12.35 ; v2(25.25,11.25) C23.1@25.25,12.35 ; L2.1@29.5,11.25 v2(29.5,12.5) ; L2.1@30.5,11.35 v2(30.5,12.5) ; L2.1@30.9,10.75 L2.1@31,10.85 L2.1@31.15,11 ; L2.1@31.5,11.35 v2(31.5,12.5) ; L6.1@41.575,38.075 L6.1@41.6,38.1 ; L3.2@41.9,61.55 41.9,61.35 v2(42.6,60.65) ; L4.2@42.175,51.275 v2@42.175,52.725 ; v2(44.9,41.35) 44.9,40.4 L5.2@45.175,40.125
  other v2: 20,11.225 20,12.075 43.15,22.65 43.25,30.425 42.175,52.75
P48V: C62.1 C63.1 C64.1 C65.1 C66.1 C67.1 C68.1 C69.1 C70.1 C71.1 C72.1 R32.1 R54.1 R60.2 R61.2 TR4.2 TR5.2 TR6.2 | length 83.3
  Top_Elec w0.254: R32.1@34.275,63.625 34.275,64.525 33.35,65.45 31.325,65.45 29.875,64 29.875,55.225 35.8,49.3 42.825,49.3 44.15,50.625 49.875,50.625 v2@50.325,50.175 ; v2@50.1,49.975 50.325,50.2 v2(50.325,50.15)
  Mid Bottom Layer w1: v2(50.325,50.15) 51.55,50.15 52,49.7 52,46.475 56.8,41.675 82.25,41.675 TR5.2@87.125,46.55
  other v1: 84.547,26.285 85.817,26.285 87.087,26.285 88.357,26.285 89.627,26.285 84.547,27.555 85.817,27.555 87.087,27.555 88.357,27.555 89.627,27.555 84.547,28.825 85.817,28.825 87.087,28.825 88.357,28.825 89.627,28.825 84.547,30.095 85.817,30.095 87.087,30.095 88.357,30.095 89.627,30.095 84.547,31.365 85.817,31.365 87.087,31.365 88.357,31.365 89.627,31.365 84.547,32.635 85.817,32.635 87.087,32.635 88.357,32.635 89.627,32.635 84.547,43.785 85.817,43.785 87.087,43.785 88.357,43.785 89.627,43.785 84.547,45.055 85.817,45.055 87.087,45.055 88.357,45.055 89.627,45.055 84.547,46.325 85.817,46.325 87.087,46.325 88.357,46.325 89.627,46.325 84.547,47.595 85.817,47.595 87.087,47.595 88.357,47.595 89.627,47.595 84.547,48.865 85.817,48.865 87.087,48.865 88.357,48.865 89.627,48.865 84.547,50.135 85.817,50.135 87.087,50.135 88.357,50.135 89.627,50.135 84.547,61.285 85.817,61.285 87.087,61.285 88.357,61.285 89.627,61.285 84.547,62.555 85.817,62.555 87.087,62.555 88.357,62.555 89.627,62.555 84.547,63.825 85.817,63.825 87.087,63.825 88.357,63.825 89.627,63.825 84.547,65.095 85.817,65.095 87.087,65.095 88.357,65.095 89.627,65.095 84.547,66.365 85.817,66.365 87.087,66.365 88.357,66.365 89.627,66.365 84.547,67.635 85.817,67.635 87.087,67.635 88.357,67.635 89.627,67.635
  other v2: 88,9 92,9 90,11 88,13 92,13 90,15 88,17 92,17 90,19 88,21 92,21 86,23 90,23 92,26 92,29 92,32 84,35 88,35 92,35 86,37 90,37 84,39 88,39 92,39 86,41 90,41 92,43 92,46 92,49 51.25,50.15 84,52 88,52 92,52 86,54 90,54 84,56 88,56 92,56 86,58 90,58 92,60 92,64 92,67 95,67 92,70
PH1: C49.2 C75.1 PH1.1 R46.1 R62.2 TR1.2 TR4.3 U13.4 | length 37.2
  Top_Elec w0.5: U13.4@41.75,69.81 C49.2@45.125,69.81 ; C49.2@45.1,69.8 47.125,69.8 50.5,66.425 R46.1@50.5,63.875 ; R46.1@50.525,63.75 v2@51.3,63.75
  Top_Elec w0.75: TR1.2@71.7,68.225 71.75,68.275 C75.1@71.75,70.475 ; 77.65,60.95 77.725,60.95 78.9,59.775 78.9,58.6 R62.2@79.075,58.425
  Mid Top Layer w0.5: v2(51.35,63.725) 53.125,65.5 66.475,65.5 TR1.2@68.1,63.875
  Mid Bottom Layer w0.254: v2@51.275,63.725 v2(51.35,63.725)
  other v1: 70,54.25 71.5,54.25 73,54.25 74.5,54.25 76,54.25 70,55.75 71.5,55.75 74.5,55.75 76,55.75 70,57.25 71.5,57.25 73,57.25 74.5,57.25 76,57.25 66.722,61.285 67.992,61.285 69.262,61.285 70.532,61.285 71.802,61.285 75.53,61.666 76.8,61.666 78.07,61.666 75.53,62.174 76.8,62.174 78.07,62.174 66.722,62.555 67.992,62.555 69.262,62.555 70.532,62.555 71.802,62.555 66.722,63.825 67.992,63.825 69.262,63.825 70.532,63.825 71.802,63.825 66.722,65.095 67.992,65.095 69.262,65.095 70.532,65.095 71.802,65.095 66.722,66.365 67.992,66.365 69.262,66.365 70.532,66.365 71.802,66.365 66.722,67.635 67.992,67.635 69.262,67.635 70.532,67.635 71.802,67.635
  other v4: 70.75,55 72.377,55 73.75,55 75.25,55 70.75,56.5 72.328,56.5 73.75,56.5 75.25,56.5
PH2: C50.2 C74.1 PH2.1 R49.1 R63.2 TR2.2 TR5.3 U14.4 | length 43.9
  Top_Elec w0.5: U14.4@41.75,59.06 44.64,59.06 45.275,58.425 45.275,58.225 45.5,58.45 C50.2@45.5,58.3 ; C50.2@45.425,58.3 C50.2@45.5,58.3 ; v2@46.75,58.3 C50.2@45.5,58.3 ; R49.1@50.525,62.175 v2@51.425,62.175
  Top_Elec w0.75: 73.3,50.875 74.05,51.625 77.975,51.625 C74.1@79.075,52.725 ; 77.375,43.575 77.925,43.575 78.9,42.6 R63.2@78.9,41.7
  Mid Top Layer w0.5: v2(46.76,58.29) 50.62,62.15 52.975,62.15 64.925,50.2 TR2.2@68.075,50.2
  other v1: 70,36.775 71.5,36.775 73,36.775 74.5,36.775 76,36.775 70,38.275 71.5,38.275 74.5,38.275 76,38.275 70,39.775 71.5,39.775 73,39.775 74.5,39.775 76,39.775 66.747,43.785 68.017,43.785 69.287,43.785 70.557,43.785 71.827,43.785 75.53,44.166 76.8,44.166 78.07,44.166 75.53,44.674 76.8,44.674 78.07,44.674 66.747,45.055 68.017,45.055 69.287,45.055 70.557,45.055 71.827,45.055 66.747,46.325 68.017,46.325 69.287,46.325 70.557,46.325 71.827,46.325 66.747,47.595 68.017,47.595 69.287,47.595 70.557,47.595 71.827,47.595 66.747,48.865 68.017,48.865 69.287,48.865 70.557,48.865 71.827,48.865 66.747,50.135 68.017,50.135 69.287,50.135 70.557,50.135 71.827,50.135
  other v2: 51.425,62.15
  other v4: 70.75,37.525 72.377,37.525 73.75,37.525 75.25,37.525 70.75,39.025 72.328,39.025 73.75,39.025 75.25,39.025
PH3: C51.2 C76.2 PH3.1 R50.1 R52.1 R64.2 TR3.2 TR6.3 U15.4 | length 131.7
  Top_Elec w0.254: R52.1@45.7,12.75 R52.1@45.75,12.75 ; R52.1@45.725,12.575 46.4,13.25 46.4,18.125 v3@46,18.525
  Top_Elec w0.5: U15.4@41.75,48.31 42.96,48.31 44.1,49.45 C51.2@45.5,49.45 ; C51.2@45.275,49.55 v2@46.575,49.55 ; R50.1@50.525,60.6 v2(51.35,60.6)
  Top_Elec w0.75: v2(64.45,70.575) 65.95,70.575 R64.2@65.975,70.6 ; 73.475,33.575 74.175,34.275 77.975,34.275 78.925,35.225 C76.2@78.925,35.85
  Mid Top Layer w0.254: v3(45.975,18.55) 48.125,20.7 48.125,28.65 42.15,34.625 42.15,47.65 44.05,49.55 v2@46.6,49.55
  Mid Top Layer w0.5: v2(46.585,49.54) 46.585,55.815 51.345,60.575 v2@51.375,60.575 ; TR3.2@66.85,30.875 TR3.2@67.85,31.875
  Mid Top Layer w0.75: v2(51.35,60.6) 52.25,60.6 64.075,48.775 64.075,42.775 67.85,39 TR3.2@67.85,31.875
  Mid Bottom Layer w0.75: v2(51.35,60.6) 50.85,60.6 49.475,61.975 49.475,64.3 55.75,70.575 v2(64.45,70.575) v2@64.475,70.575
  other v1: 70,19.25 71.5,19.25 73,19.25 74.5,19.25 76,19.25 70,20.75 71.5,20.75 74.5,20.75 76,20.75 70,22.25 71.5,22.25 73,22.25 74.5,22.25 76,22.25 66.747,26.285 68.017,26.285 69.287,26.285 70.557,26.285 71.827,26.285 75.53,26.666 76.8,26.666 78.07,26.666 75.53,27.174 76.8,27.174 78.07,27.174 66.747,27.555 68.017,27.555 69.287,27.555 70.557,27.555 71.827,27.555 66.747,28.825 68.017,28.825 69.287,28.825 70.557,28.825 71.827,28.825 66.747,30.095 68.017,30.095 69.287,30.095 70.557,30.095 71.827,30.095 66.747,31.365 68.017,31.365 69.287,31.365 70.557,31.365 71.827,31.365 66.747,32.635 68.017,32.635 69.287,32.635 70.557,32.635 71.827,32.635
  other v4: 70.75,20 72.377,20 73.75,20 75.25,20 70.75,21.5 72.328,21.5 73.75,21.5 75.25,21.5
PH3_STALL: C13.1 R52.2 R53.1 U11.42 | length 37.1
  Top_Elec w0.254: C13.1@18.725,26.8 18.725,25.95 17.7,24.925 17.7,23 18.197,22.503 19.706,22.503 19.953,22.75 U11.42@21.4,22.75 v3(23.5,22.75) v3@23.55,22.75 ; v3@43.025,14.025 R52.2@44.3,12.75 ; R52.2@44.275,12.75 44.3,12.725 R53.1@44.3,11.075
  Mid Top Layer w0.254: v3(23.5,22.75) 27.485,22.75 35.76,14.475 42.6,14.475 v3(43.075,14)
RESET: JTAG.2 U5.1 U10.31 U11.3 | length 77.3
  Top_Elec w0.254: U5.1@15.875,30.3 16.95,30.3 18,29.25 18,28.981 17.997,28.978 17.997,26.372 16.9,25.275 16.9,21.575 v3@16.875,21.55 ; v3@16.95,51.025 17.225,51.3 21.194,51.3 21.197,51.303 21.197,49.953 U10.31@21.25,49.9 ; U11.3@24.25,17.9 v3(24.25,19.025) v3@24.25,19.075
  Mid Top Layer w0.254: v3@16.875,21.55 18.6,19.825 23.45,19.825 v3(24.25,19.025) ; v3@16.875,21.553 v3(16.891,21.569) ; v3(16.9,30.275) 16.875,30.3 16.875,31.65 16.35,32.175 16.35,50.475 v3(16.9,51.025) ; v3@21.175,51.35 21.175,51.925 21.875,52.625 23.65,52.625 24.4,51.875 24.4,44.2 25.375,43.225 25.375,36.7 26.4,35.675 32.535,35.675 JTAG.2@34.21,34
  other v3: 21.175,51.325
RXIN_232: RS232.2 U8.13 | length 24.8
  Top_Elec w0.3: v3@16.375,54.925 U8.13@17.7,54.925
  Mid Top Layer w0.3: RS232.2@3.5,43.55 1.825,45.225 1.825,49.575 3.925,51.675 6.025,51.675 9.275,54.925 v3(16.325,54.925)
SCL: R12.2 U2.9 U11.15 | length 30
  Top_Elec w0.254: U2.9@6.8,27.85 7.9,27.85 9,26.75 12.75,26.75 13.5,27.5 15.25,27.5 15.75,27 R12.2@15.75,26.75 ; R12.2@15.775,26.6 15.925,26.45 15.925,22.25 v3(15.85,22.175) v3@15.875,22.15 ; v3@28.875,20.75 U11.15@30.6,20.75
  Mid Top Layer w0.254: v3@15.863,22.187 15.875,22.175 17.25,22.175 18.7,20.725 28.802,20.725 v3(28.826,20.701)
SDA: R11.2 U2.10 U11.16 | length 30.5
  Top_Elec w0.254: U2.10@6.8,27.35 7.9,26.25 13.25,26.25 13.75,26.75 R11.2@14.25,26.75 ; v3(14.275,22.475) R11.2@14.275,26.8 ; v3@29.225,21.625 29.6,21.25 U11.16@30.6,21.25
  Mid Top Layer w0.254: v3(14.275,22.475) 15.275,23.475 17.725,23.475 18.35,22.85 22.9,22.85 23.35,23.3 27.525,23.3 27.624,23.201 27.634,23.201 29.235,21.6 v3@29.275,21.6
  other v3: 29.276,21.626
SWCLK: JTAG.3 U11.29 | length 12.6
  Top_Elec w0.254: v3@25.475,32.225 25.475,29.375 26.75,28.1 U11.29@26.75,27.1
  Mid Top Layer w0.254: v3(25.475,32.25) 29.925,32.25 JTAG.3@31.675,34
SWDIO: JTAG.4 U11.39 | length 17.9
  Top_Elec w0.254: v3@20.95,30.35 20.925,30.325 20.925,27.15 22.8,25.275 22.8,24.5 22.55,24.25 U11.39@21.4,24.25
  Mid Top Layer w0.254: v3(20.925,30.375) 22.1,30.375 25.725,34 JTAG.4@29.13,34 JTAG.4@29.175,34
TEMP: R8.2 U11.40 | length 16.6
  Top_Elec w0.254: v3(14.475,32.7) 14.85,32.325 14.85,31.575 15.475,30.95 17.05,30.95 18.05,29.95 19.325,29.95 20.025,29.25 20.025,28.475 19.8,28.25 19.8,24.225 20.275,23.75 U11.40@21.4,23.75 ; R8.2@14.55,34.075 14.625,34 v3(15.2,34)
  Mid Top Layer w0.254: v3(14.475,32.7) 14.475,33.275 v3(15.2,34)
TEMP_IN: C15.1 R14.2 RT1.1 U4.3 | length 128.7
  Top_Elec w0.254: U4.3@13.875,40.2 13.8,40.125 13.8,39.925 v3(14.4,39.325) ; v3(16.05,31.5) 17.625,31.5 18.075,31.05 R14.2@18.75,31.05 ; R14.2@18.75,31.075 18.775,31.05 20.275,31.05 C15.1@20.353,30.972 ; C15.1@20.1,31 20.125,30.975 v3(20.125,30.225)
  Mid Top Layer w0.254: v3@14.4,39.35 15.8,37.95 15.8,31.75 v3(16.05,31.5) ; v3@20.125,30.2 20.8,29.525 25.075,29.525 27.1,31.55 38.35,31.55 39.575,30.325 39.575,17.575 40.9,16.25 45.2,16.25 49.65,20.7 49.65,28.875 47.575,30.95 47.575,39.2 49.45,41.075 53.6,41.075 55.575,39.1 55.575,31.175 56.175,30.575 61.775,30.575 63.6,28.75 63.6,25.725 65.125,24.2 78.375,24.2 79.975,22.6 v3@79.975,21.775
  other v3: 79.575,21.75 79.975,21.75 79.575,22.25 79.975,22.25
THERMO: C20.1 HAL.5 R18.2 U11.30 | length 34
  Top_Elec w0.254: HAL.5@3.55,16.475 5,16.475 v3(13.65,25.125) ; R18.2@24.15,30.5 24.2,30.45 24.2,29.025 25.094,29.025 26.25,27.869 U11.30@26.25,27.1 26.25,25.3 v3(25.825,24.875)
  Mid Top Layer w0.254: v3@13.625,25.1 14.575,24.15 19.025,24.15 19.375,23.8 24.775,23.8 25.8,24.825 v3@25.8,24.85
TXOUT_232: RS232.3 U8.14 | length 18.9
  Top_Elec w0.3: v3@16.275,54.275 U8.14@17.7,54.275
  Mid Top Layer w0.3: RS232.3@3.5,46.1 7.65,50.25 7.65,52.25 9.745,54.345 16.205,54.345 v3(16.3,54.25)
U15_Vcc: C42.1 L6.2 U17.5 | length 6.7
  Top_Elec w0.35: U17.5@39.825,32.25 40.275,32.25 40.75,32.725 40.75,34.65 40.175,35.225 C42.1@40.175,36.15 ; C42.1@40.175,36.175 L6.2@40.175,38.075
U17_Vcc: C43.1 L7.2 U18.5 | length 6.5
  Top_Elec w0.35: U18.5@39.825,24.875 39.825,24.975 40.8,25.95 40.8,27.325 40.125,28 L7.2@40.125,30.7
U19_Vcc: C44.1 L8.2 U19.5 | length 6.6
  Top_Elec w0.35: U19.5@39.95,17.425 41,18.475 41,19.875 40.55,20.325 40.55,21.225 40.35,21.425 L8.2@40.35,23.3
Vin: C59.1 C60.1 R30.1 R60.1 R61.1 TVS.1 VIN1.1 | length 109.6
  Top_Elec w0.254: R30.1@32.75,63.7 v3@32.75,64.4
  Mid Top Layer w0.254: v3@32.725,64.425 35.05,64.425 39.7,59.775 47,59.775 50.175,62.95 53.55,62.95 57.225,59.275 78.875,59.275 81.725,56.425 81.725,15.225 79.3,12.8 v1(76,12.8) v1(74.5,12.8) VIN1.1@73,12.8 v1(71.5,12.8) v1(70,12.8)
  other v1: 70,11.3 71.5,11.3 73,11.3 74.5,11.3 76,11.3 70,14.3 71.5,14.3 73,14.3 74.5,14.3 76,14.3
  other v2: 78,11.5 67,12.5 68.5,14 78,14 67,15.5 70.5,16 73,16 75.5,16 78,16 68.5,17 78,18 67,18.5 66.925,20.85
  other v3: 32.75,64.425
  other v4: 70.75,12.05 72.25,12.05 73.672,12.05 75.25,12.05 70.75,13.55 72.25,13.55 73.623,13.55 75.25,13.55
pads on no net: C4.1 C4.2 C6.1 C6.2 C53.1 C53.2 C54.1 C54.2 C55.1 C55.2 C57.1 C57.2 D2.2 D8.1 D8.2 D8.3 D9.1 D9.2 L9.1 L9.2 R1.1 R1.2 R2.1 R2.2 R3.1 R3.2 R7.1 R7.2 R55.1 R59.1 R59.2 U1.8 U6.4 U8.7 U8.8 U8.9 U8.10 U10.3 U10.5 U10.13 U10.19 U10.22 U10.30 U11.10 U11.12 U11.14 U11.18 U11.19 U11.20 U11.31 U11.36 U11.37 U11.38 U11.48 U12.4 U16.6
copper on no net:
  other v2: 4.225,1.75 2.4,2.275 5.875,2.55 1.8,3.9 6.25,4.15 5.7,5.525 2.4,5.75 4.2,6.275 4.05,65.575 5.7,66.325 2.35,66.375 6.275,68 1.6,68.025 5.7,69.625 2.3,69.65 4.025,70.325
  other v5: 4,4 4,68

## Polygon pours and split planes (outlines as drawn)
GND on Bottom_GND "Bottom_GND1" (solid, remove dead copper, pour order 75): 52.625,71.3 52.625,49.2 52.625,0.875 104.15,0.875 104.15,71.3
PH3 on Bottom_GND "Bottom_PH3" (solid, pour order 79): 64.15,34 64.15,25.1 69.025,20.225 69.025,18.825 69.625,18.225 76.425,18.225 77.35,19.15 77.35,24.975 78.875,26.5 78.875,30.55 74.925,30.55 74,31.475 74,34
P48V on Bottom_GND "Bottom_GND P48V" (solid, pour order 85): 80.375,71.2 80.375,23.2 82.9,20.675 82.9,8.725 83.4,8.225 95.75,8.225 96.875,9.35 96.875,68.9 94.575,71.2
PH2 on Bottom_GND "Bottom_PH1" (solid, pour order 97): 64.15,51.475 64.15,42.55 69.025,37.675 69.025,36.275 69.625,35.675 76.425,35.675 77.35,36.6 77.35,42.425 78.875,43.95 78.875,48 74.925,48 74,48.925 74,51.475
PH1 on Bottom_GND "Bottom_PH1" (solid, pour order 99): 64.125,68.925 64.125,60 69,55.125 69,53.725 69.6,53.125 76.4,53.125 77.325,54.05 77.325,59.875 78.85,61.4 78.85,65.45 74.9,65.45 73.975,66.375 73.975,68.925
Vin on Bottom_GND "Bottom_GNDVin" (solid, pour order 103): 63.95,22.775 63.625,22.45 63.625,9.725 65.25,8.1 81.825,8.1 82.225,8.5 82.225,20.175 81.775,20.625 79.2,20.625 78.425,19.85 78.425,19.025 76.8,17.4 69.125,17.4 67.55,18.975 67.55,20.725 65.5,22.775
GND on Bottom_GND "Bottom_GND" (solid, pour order 73): 0.625,57.05 14.875,71.3 51.875,71.3 51.875,0.9 11.75,0.9 0.625,12.025
GND on Bottom_GND "Bottom_GND2" (solid, pour order 89): 49.514,68.541 49.514,40.766 54.639,40.766 54.639,68.541
P12V on Mid Bottom Layer "Mid Bottom P12V" (solid, pour order 31): 17.5,0.9 47,0.9 47,71.25 14.75,71.25 1.25,57.75 1.25,50 7.25,50 11.153,53.903 35,53.903 35,43.25 41.5,43.25 41.5,17.975 39.175,15.65 22.9,15.65 17.5,10.25
Vin on Mid Bottom Layer "Mid Bottom Vin" (solid, pour order 93): 63.775,23.575 63.625,23.425 63.625,9.775 65.25,8.15 81.825,8.15 82.225,8.55 82.225,20.225 81.775,20.675 79.2,20.675 78.425,19.9 78.425,19.075 76.8,17.45 69.125,17.45 67.55,19.025 67.55,21.525 65.5,23.575
GND on Mid Bottom Layer "Mid_Bottom_GND1" (solid, remove dead copper, pour order 101): 52.45,65.2 52.45,49.2 52.45,0.875 103.975,0.875 103.975,71.332 80.2,71.332 80.2,65.2
P5V on Mid Bottom Layer "Mid Bottom P5V" (solid, pour order 29): 16.75,0.9 11.85,0.9 1.25,11.5 1.25,49.25 5.5,49.25 5.5,44.275 18.225,44.275 24.25,38.25 27.75,38.25 27.75,27 22.5,27 22.5,34.525 20.25,36.775 5.75,36.775 5.75,20.75 17.5,20.75 17.5,15.75 22,15.75 22,15.5 16.75,10.25
P3V3_ARROW on Mid Bottom Layer "Mid Bottom P3.3V" (solid, pour order 33): 6.25,36.25 6.25,21.25 18.5,21.25 18.5,16.25 38.75,16.25 40.75,18.25 40.75,42.5 33.75,42.5 33.75,53.25 11.5,53.25 6.25,48 6.25,45 18.575,45 24.825,38.75 28.4,38.75 28.4,26.25 21.8,26.25 21.8,34.45 20,36.25
P48V on Top_Elec "Top Elec-P48V" (solid, pour order 71): 80.375,71.225 80.375,23.175 82.9,20.65 82.9,8.7 83.4,8.2 95.75,8.2 96.875,9.325 96.875,68.875 94.525,71.225
Vin on Top_Elec "Top Elec-Vin" (solid, pour order 69): 63.625,23.425 63.625,9.775 65.25,8.15 81.825,8.15 82.225,8.55 82.225,20.2 81.75,20.675 79.2,20.675 78.425,19.9 78.425,19.1 76.775,17.45 69.15,17.45 67.55,19.05 67.55,21.515 65.459,23.575 63.775,23.575
98 on Top_Elec "Top Elec-98" (solid, pour order 47): 28.2,6.1 28.2,2.1 40.4,2.1 40.4,5.6 36.662,5.6 36.662,9.062 37.8,10.2 37.8,13.6 35,13.6 34.7,13.3 34.7,6.1
PH1 on Top_Elec "Top Elec-PH1" (solid, pour order 61): 64.025,60.4 64.025,59.15 65.875,59.15 68.325,56.7 68.325,53.225 77.225,53.225 77.225,59.85 78.75,61.375 78.75,65.775 74.625,65.775 73.9,66.5 73.9,69.05 64.025,69.05
PH2 on Top_Elec "Top Elec-PH2" (solid, pour order 63): 64.025,42.9 64.025,41.625 65.9,41.625 68.325,39.2 68.325,35.725 77.225,35.725 77.225,42.35 78.75,43.875 78.75,48.275 74.625,48.275 73.9,49 73.9,51.55 64.025,51.55
PH3 on Top_Elec "Top Elec-PH3" (solid, pour order 65): 64.05,25.4 64.05,24.125 65.925,24.125 68.325,21.725 68.325,19.425 69.525,18.225 76.225,18.225 77.339,19.339 77.339,24.939 78.775,26.375 78.775,30.775 74.65,30.775 73.925,31.5 73.925,34.05 64.05,34.05
P48V on Top_Elec "Top_Elec_P48V" (solid, pour order 91): 49.875,50.75 49.875,49.875 50.2,49.55 50.2,48.35 50.375,48.175 51.25,48.175 51.45,48.375 51.45,49.675 51.75,49.975 51.75,50.75
GND on Top_Elec "Top Elec-GND" (solid, pour order 51): 52.475,0.875 52.475,64.725 62.573,64.725 62.573,9.583 64.668,7.488 96.029,7.488 97.925,9.383 97.925,71.225 104.125,71.225 104.125,0.875
GND on Mid Top Layer "Mid Top GND" (solid, pour order 105): 52.45,29.75 52.45,0.875 104.15,0.875 104.15,71.3 96.9,71.3 96.25,70.65 96.25,10.6 92.65,7 84.15,7 81.575,9.575 65.075,9.575 62.225,12.425 62.225,27.9 60.375,29.75

## Silkscreen, mask and mechanical layers (free items; w line width, h text height)
Top silk:
  lines w0.2: 9.175,34.925 9.8,34.925 10.275,35.4 ; 12.2,37.3 12.2,36.9 12.575,36.525 ; 38.875,30 38.875,32.25 38.85,32.275 36.1,32.275 36.1,21.025 ; 38.9,26.9 38.9,21.025 36.1,21.025 ; 46.05,31.05 46.175,30.925 47.4,30.925 ; 55.3,24.675 55.3,17.625 55.225,17.55 51.95,17.55 51.95,30.775 55.3,30.775 ; 55.3,27.775 55.3,30.775 ; 36.1,21.025 36.1,21.025 ; 55.3,30.775 55.3,30.775
  text "GND-->" at 93.25,67.6 h0.8
  text "N.C." at 2.2,63.3 h0.8
  text "Spinner V1.2 / (c) BSRF 2017" at 8.45,61.675 h1.5
  text "GND-->" at 56.15,37.825 h0.8
  text "N.C." at 2.725,7.45 h0.8
  text "GND-->" at 93.3,3.875 h0.8
Mechanbical 1:
  the board outline again, w0.254